# Altium PCB RT9187.PcbDoc
Units mm, origin at the board's own origin, x right, y up, seen from the top; angles counter-clockwise.
Board outline 14.86 x 14.86 mm, 2 copper layers (Top Layer, Bottom Layer); 7 components, 6 nets, 21 pads, 4 vias.
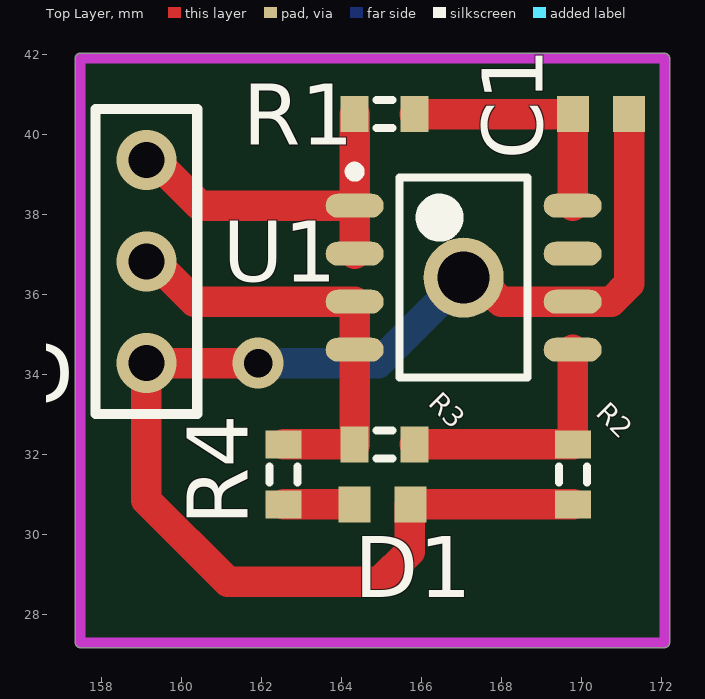
[diagram p0: Top Layer view]
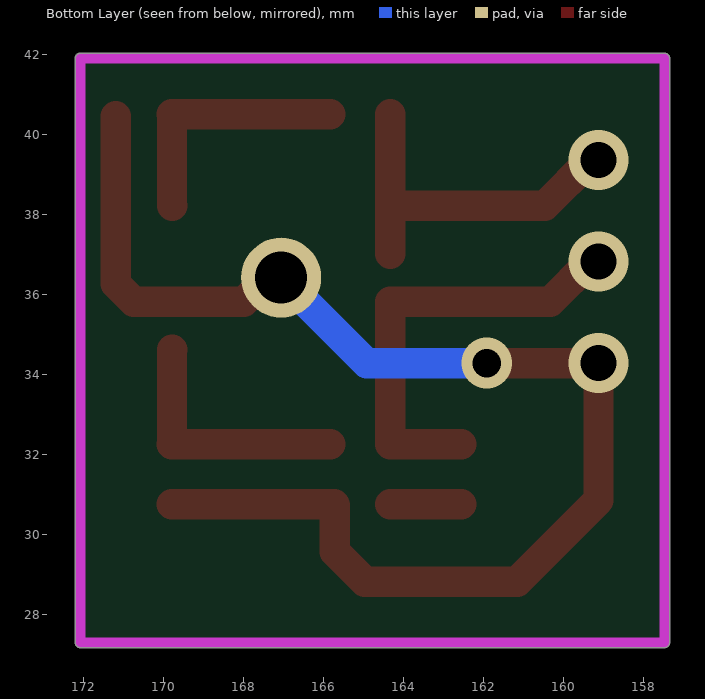
[diagram p1: Bottom Layer view, seen from below]

## Layer stack, top to bottom
Top Solder: solder mask 0.0102, Solder Resist, Dk 3.5
Top Layer: signal copper 0.0356
Dielectric 1: dielectric 0.32, FR-4, Dk 4.8
Bottom Layer: signal copper 0.0356
Bottom Solder: solder mask 0.0102, Solder Resist, Dk 3.5

## Board outline
157.353,27.305 ccw(c157.48,27.305) 157.48,27.178 172.085,27.178 ccw(c172.085,27.305) 172.212,27.305 172.212,41.91 ccw(c172.085,41.91) 172.085,42.037 157.48,42.037 ccw(c157.48,41.91) 157.353,41.91

## Design rules (kind name [scope] priority, off if disabled: settings)
Clearance [All] p1: gap=0.254 ignorepadtopadclearanceinfootprint=FALSE except(0: Arc-Hole Track-Hole SMDPad-Hole THPad-Hole Via-Hole Fill-Hole Poly-Hole Region-Hole Text-Hole)
PolygonConnect [All] p1: connectstyle=Relief reliefconductorwidth=0.254 reliefentries=4 polygonreliefangle="90 Angle" airgapwidth=0.254
RoutingVias [All] p1: holewidth=0.711 width=1.27 viastyle="Through Hole" minholewidth=0.711 minwidth=1.27 maxholewidth=0.711 maxwidth=1.27
SolderMaskExpansion [All] p1: expansion=0.102 istentingtop=FALSE
Width [All] p1: maxlimit=0.762 minlimit=0.254 preferedwidth=0.762 minimp=50.000000 maximp=50.000000 favimp=50.000000
30 further rules are at their usual default settings.

## Components (designator, comment, footprint, x,y, rotation, side; value= is the part's Value field where it differs from the comment)
C1 "Cap Semi" 1608[0603] 170.499,40.513 r180 top value=1uF
D1 "LED0603" LED0603 164.338,30.758 r0 top
R1 "Res3" J1-0603 165.088,40.513 r0 top value=1K
R2 "Res3" J1-0603 169.799,31.508 r90 top value=100
R3 "Res3" J1-0603 165.088,32.258 r0 top value=330
R4 "Res3" J1-0603 162.56,31.508 r270 top value=330
U1 "RT9187" RT9187 167.063,36.427 r0 top

## Footprints (in the part's own frame and the unit in brackets; to place one, negate y for a bottom-side part, rotate by r counter-clockwise, add the part's x,y. Pads: shape width x height; smd on the part's side, far side on the other; paste and mask are expansions set on the pad)
1608[0603] [mm] "Chip Capacitor, Body 1.6x0.8mm, IPC High Density"
  rect 0.8x0.9 smd: 1(-0.7,0) 2(0.7,0)
  body extent -0.87,-0.48 0.87,0.48, height 1.3
J1-0603 [mm] "Chip Resistor, Body 1.6x0.8mm, IPC High Density"
  rect 0.7x0.9 smd: 1(-0.75,0) 2(0.75,0)
  silkscreen extent -0.2,-0.35 0.2,0.35, body extent -0.85,-0.48 0.85,0.48, height 0.9
LED0603 [mm]
  rect 0.8x0.9 smd: 1(0,0) 2(1.4,0)
  body extent -0.18,-0.48 1.57,0.47, height 1.3
RT9187 [mm]
  oval 1.45x0.6 smd: 1(-2.725,1.8) 2(-2.725,0.6) 3(-2.725,-0.6) 4(-2.725,-1.8) 5(2.725,-1.8) 6(2.725,-0.6) 7(2.725,0.6) 8(2.725,1.8)
  round 2 hole 1.3: 9(0,0)
  silkscreen extent -2.85,-2.5 1.6,2.77, body extent -2,-2.5 2,2.5, height 1.76

## Part data
C1: "Capacitor (Semiconductor SIM Model)", LatestRevisionDate=29-May-2009, LatestRevisionNote="IPC-7351 Footprint Added.", PackageDescription="Chip Capacitor", PackageReference=C1206, Published=8-Jun-2000, Publisher="Altium Limited"
R1 R2 R3 R4: "Resistor", LatestRevisionDate=29-May-2009, LatestRevisionNote="IPC-7351 Footprint Added.", PackageDescription="Chip Resistor", PackageReference=J1-0603, Published=8-Jun-2000, Publisher="Altium Limited"

## Via types
v1: diameter 1.5, hole 0.9, Top Layer to Bottom Layer, 3 vias
v2: diameter 1.27, hole 0.711, Top Layer to Bottom Layer, 1 vias

## Nets (pads, with @x,y where several pads share a name; then routed paths per layer and width w, separated by ;. In a path a pad name is that pad's centre, name@x,y a point inside that pad or via, vN(x,y) a via of type N, cw(c..) or ccw(c..) an arc to the next point about the centre after c; other vN are vias at no path point)
BP/ADJ: R2.2 R3.2 U1.5 | length 6.3
  Top Layer w0.762: R3.2 R2.2 169.793,32.264 169.793,34.622 U1.5
GND: C1.1 D1.2 R2.1 U1.6 U1.9 | length 34
  Top Layer w0.762: v2(161.925,34.29) v1(159.131,34.29) 159.131,30.861 161.163,28.829 164.973,28.829 165.719,29.575 165.719,30.739 D1.2 R2.1 ; U1.9 167.398,36.427 167.998,35.827 U1.6 170.753,35.827 171.199,36.273 C1.1@171.199,40.463
  Bottom Layer w0.762: v2(161.925,34.29) 164.926,34.29 U1.9 U1.9@167.097,36.393
NetC1_2: C1.2 R1.2 U1.8 | length 6.3
  Top Layer w0.762: R1.2 C1.2 169.793,40.507 169.793,38.232 U1.8
NetD1_1: D1.1 R4.2 | length 1.8
  Top Layer w0.762: R4.2 D1.1
Vin: R1.1 U1.1 U1.2 | length 9.2
  Top Layer w0.762: v1(159.131,39.37) 159.331,39.37 160.474,38.227 U1.1 ; U1.2 U1.1 ; R1.1 U1.1
Vout: R3.1 R4.1 U1.3 U1.4 | length 11
  Top Layer w0.762: v1(159.131,36.83) 159.331,36.83 160.334,35.827 U1.3 U1.4 R3.1 R4.1
pads on no net: U1.7

## Keep-outs
Keep-Out Layer:
  lines w0.254: 157.48,27.305 166.37,27.305 172.085,27.305 172.085,41.275 172.085,41.91 157.48,41.91 157.48,27.305

## Silkscreen, mask and mechanical layers (free items; w line width, h text height)
Top Overlay:
  lines w0.254: 157.861,33.02 160.401,33.02 160.401,40.64 157.861,40.64 157.861,33.02
  text "Vin" at 152.527,39.116 h1.52
  text "Vout" at 151.511,36.322 h1.52
  text "GND" at 152.527,33.274 h1.52